# EAGLE board Transistor PCB (EAGLE 9.7.0)
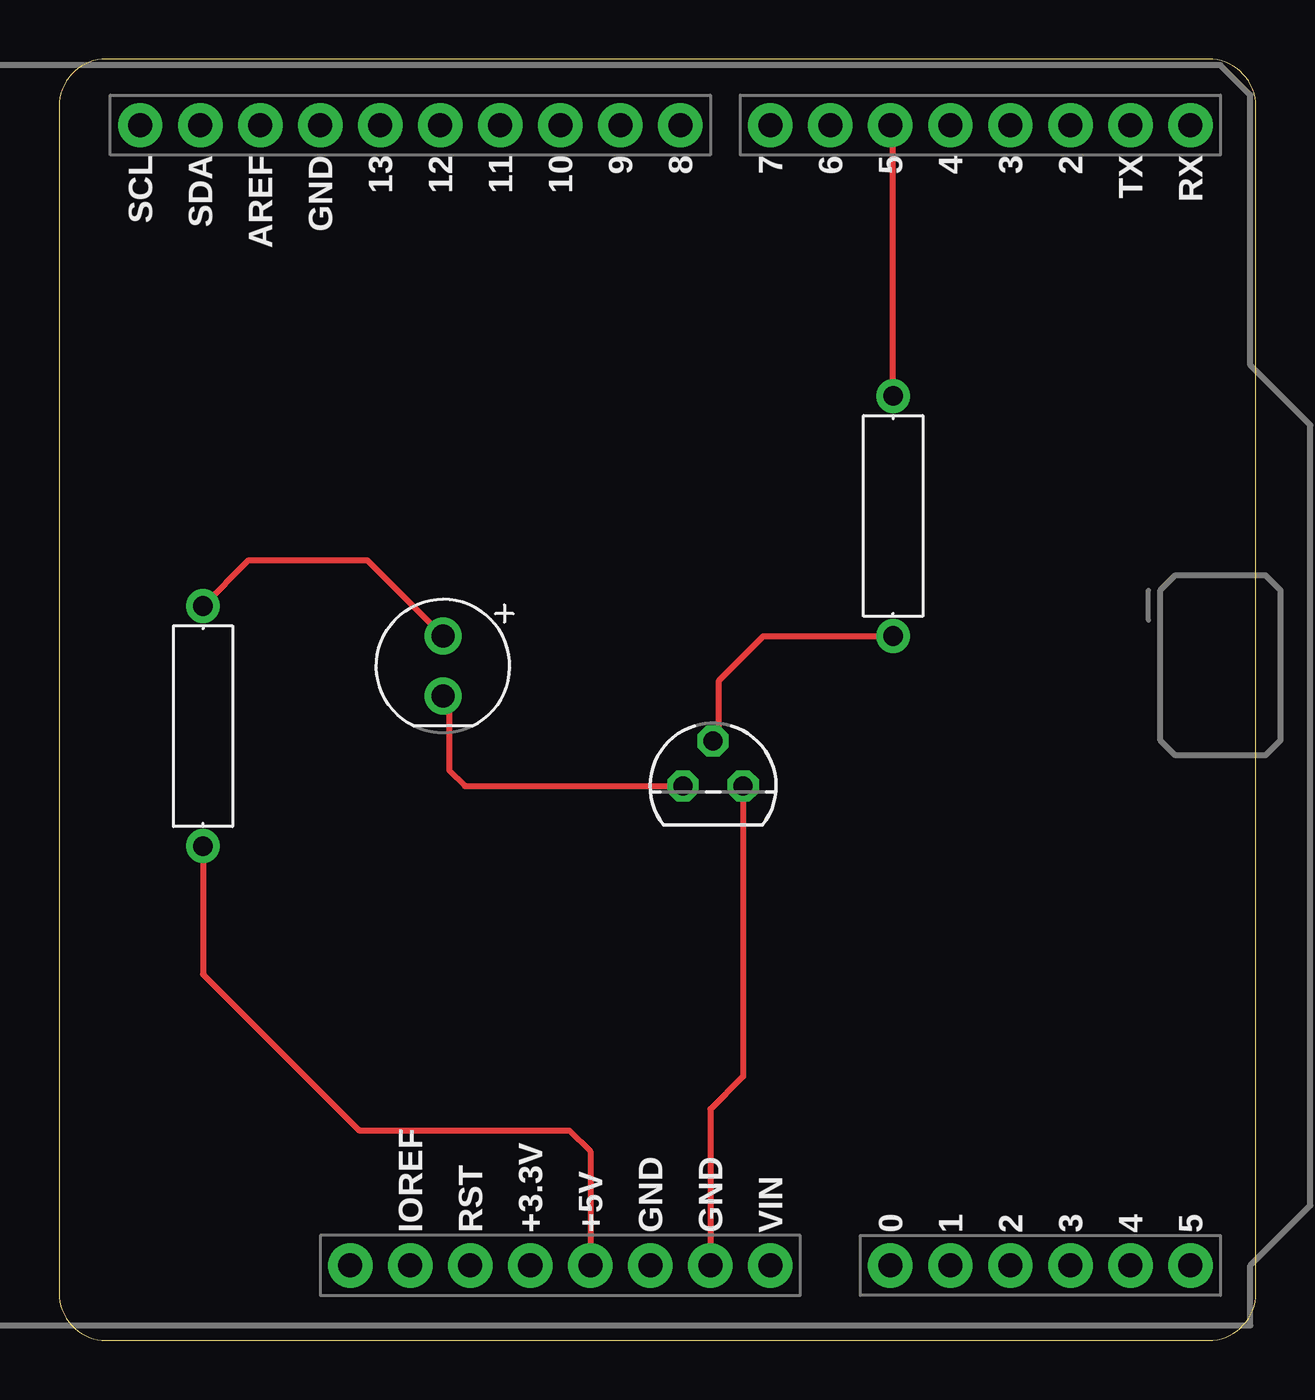
[diagram p0: board, top side]

Size 50.65 x 54.23 mm. Coordinates in mm from the lower left corner, seen from the top.
Outline: 48.65,0 arc90 50.65,2 50.65,52.23 arc90 48.65,54.23 2,54.23 arc90 0,52.23 0,2 arc90 2,0 48.65,0
Copper layers (1*16): Top 0.035mm / dielectric 1.5mm / Bottom 0.035mm
Design rules "default": minimum track width 6mil, minimum drill 0.35mm, track to track 6mil, track to pad 6mil, pad to pad 6mil, via to via 6mil, smd to smd 6mil, copper to edge 40mil, drill to drill 6mil, minimum pad ring 10mil, minimum via ring 8mil, stop-mask expansion 4mil, vias tented up to drill 0mil, thermal gap 10mil

## Footprints (pad centres in the part's own frame; a part is rotated, then mirrored left to right if it is on the bottom)
LEDRD254W60D565H860B = drill 0.981 pad 1.581: 1 -1.27,0; 2 1.27,0
RESAD1016W63L850D250B = drill 0.83 pad 1.43: 1 -5.08,0; 2 5.08,0
TO92 = drill 0.813 octagon: 1 -1.27,0; 2 0,1.905; 3 1.27,0
ARDUINO-UNO-R3-SHIELD = drill 1.016 pad 1.88: 3.3V 24.13,-2.54; 5V 24.13,0; A0 24.13,12.7; A1 24.13,15.24; A2 24.13,17.78; A3 24.13,20.32; A4 24.13,22.86; A5 24.13,25.4; AREF -24.13,-13.97; D2 -24.13,20.32; D3 -24.13,17.78; D4 -24.13,15.24; D5 -24.13,12.7; D6 -24.13,10.16; D7 -24.13,7.62; D8 -24.13,3.81; D9 -24.13,1.27; D10 -24.13,-1.27; D11 -24.13,-3.81; D12 -24.13,-6.35; D13 -24.13,-8.89; GND@0 24.13,2.54; GND@1 24.13,5.08; GND@2 -24.13,-11.43; IOREF 24.13,-7.62; NC 24.13,-10.16; RES 24.13,-5.08; RX -24.13,25.4; SCL -24.13,-19.05; SDA -24.13,-16.51; TX -24.13,22.86; VIN 24.13,7.62

## Placement (x,y rotation side)
D1  RED  [LEDRD254W60D565H860B]  16.25,28.54 270 top
R1  1k  [RESAD1016W63L850D250B]  6.09,26 90 top
R2  1k  [RESAD1016W63L850D250B]  35.3,34.89 270 top
T1  NPN  [TO92]  27.68,23.46 0 top
U1  ARDUINO-UNO-R3-SHIELD  [ARDUINO-UNO-R3-SHIELD]  22.48,27.3 270 top

## Library data of the parts
D1 = Tinkercad; CATEGORY: Opto-Electronic; SUB-CATEGORY: LED; VALUE: LED_RED
R1 R2 U1 = Tinkercad
T1 = Tinkercad; CATEGORY: Transistor; SUB-CATEGORY: BJT; TYPE: NPN

## Nets
D1_A: D1.1 R1.2
D1_C: D1.2 T1.1
T1_B: R2.2 T1.2
U1_5V: R1.1 U1.5V
U1_D5: R2.1 U1.D5
U1_GND: T1.3 U1.GND@1

## Tracks (layer width: path | path; a pad name or v marks a point on that pad's centre or on a via)
D1_A
  Top 0.254: R1.2 8.03,33.02 13.05,33.02 D1.1
D1_C
  Top 0.254: D1.2 16.51,27.02 16.51,24.13 17.18,23.46 T1.1
T1_B
  Top 0.254: T1.2 27.94,25.63 27.94,27.94 29.81,29.81 R2.2
U1_5V
  Top 0.254: R1.1 6.09,15.5 12.7,8.89 21.59,8.89 22.48,8 U1.5V
U1_D5
  Top 0.254: R2.1 35.3,51.32 U1.D5
U1_GND
  Top 0.254: T1.3 28.95,11.17 27.57,9.79 U1.GND@1